# Altium PCB Eric Dog Tag PCB.PcbDoc
Units mil, origin at the board's own origin, x right, y up, seen from the top; angles counter-clockwise.
Board outline 1765 x 920 mil, 2 copper layers (Top Layer, Bottom Layer); 5 components, 4 nets, 20 pads, 0 vias.
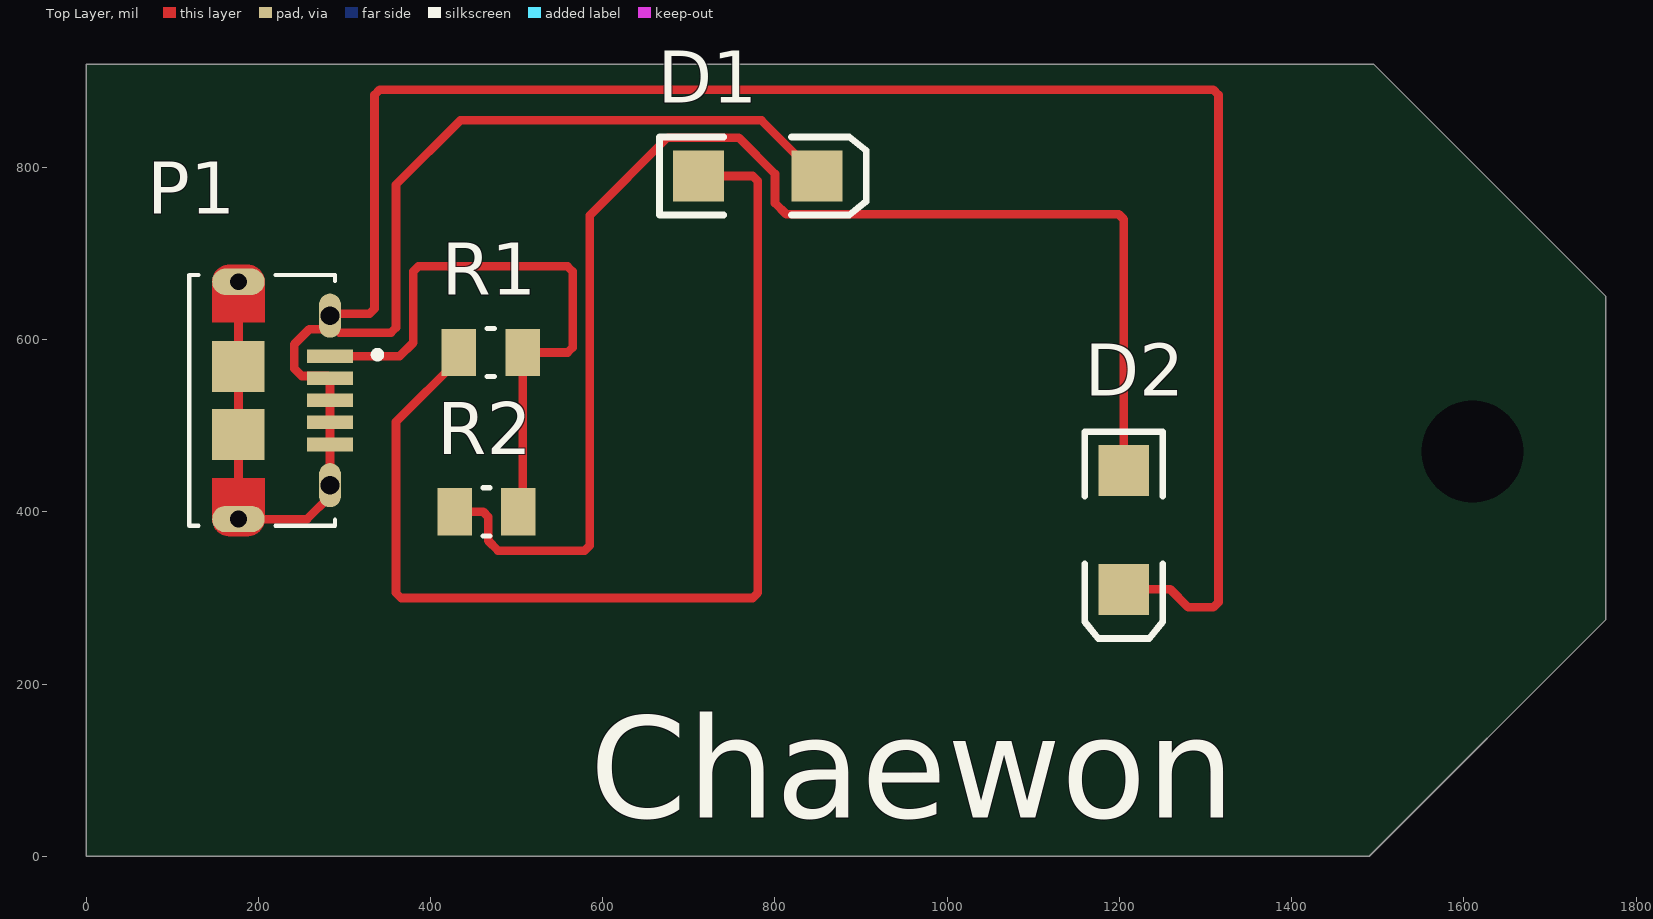
[diagram p0: Top Layer view]
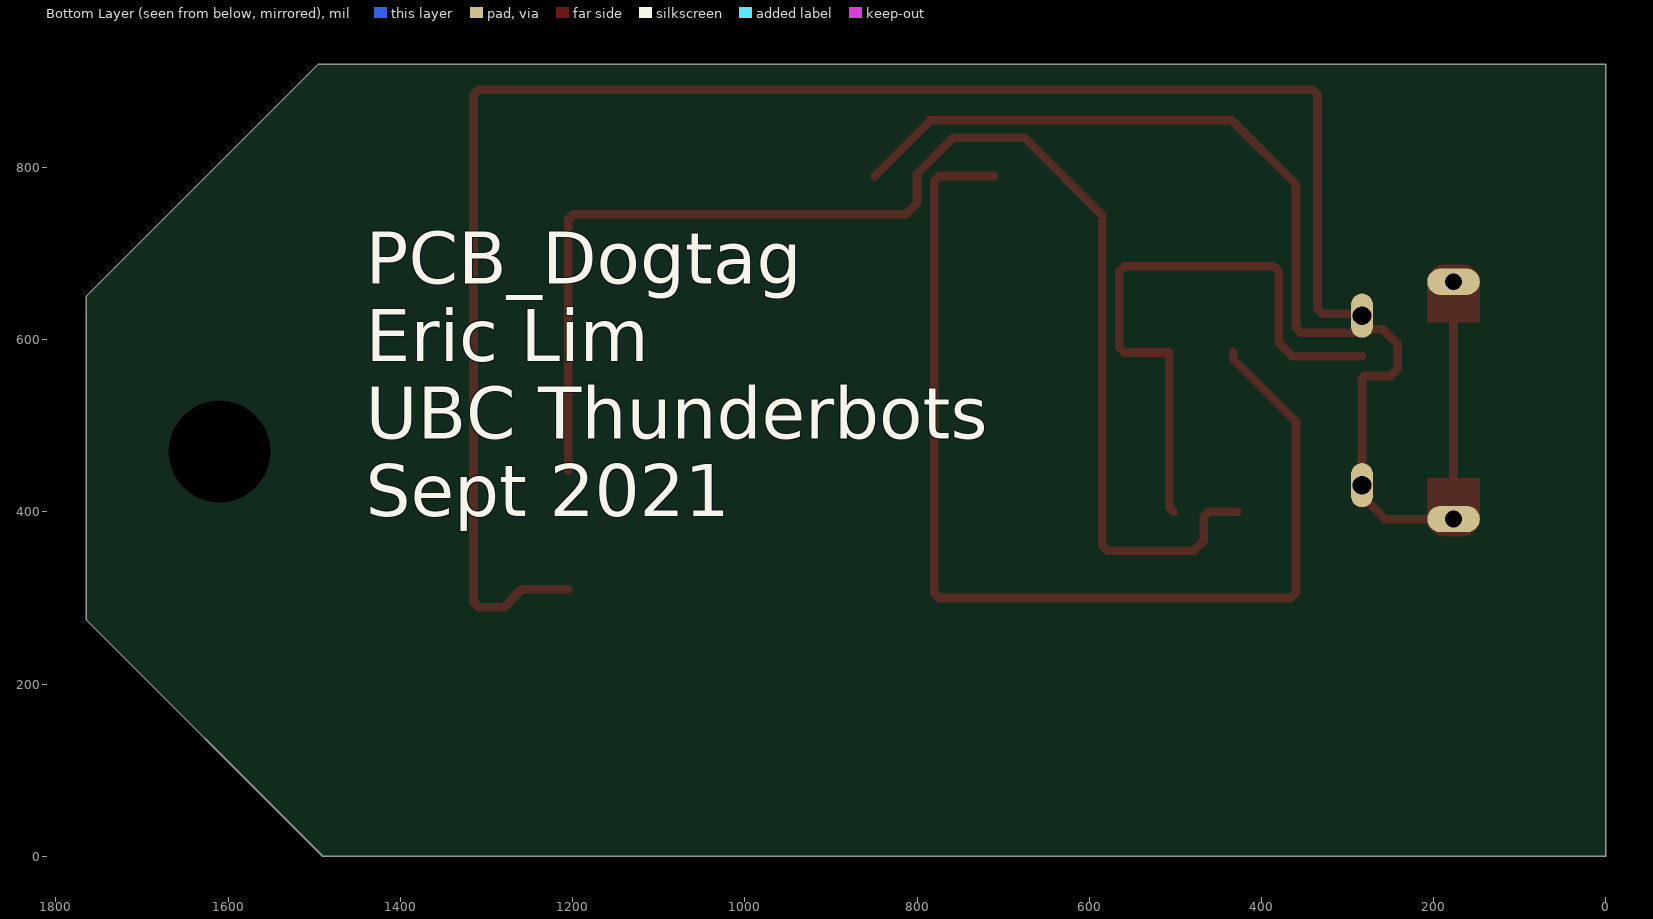
[diagram p1: Bottom Layer view, seen from below]

## Layer stack, top to bottom
Top Solder: solder mask 0.4, Solder Resist, Dk 3.5
Top Layer: signal copper 1.4
Dielectric 1: dielectric 12.6, FR-4, Dk 4.8
Bottom Layer: signal copper 1.4
Bottom Solder: solder mask 0.4, Solder Resist, Dk 3.5

## Board outline
1495,920 1765,650 1765,275 1490,0 0,0 0,920

## Design rules (kind name [scope] priority, off if disabled: settings)
Clearance [All] p1: gap=10 ignorepadtopadclearanceinfootprint=FALSE except(0: Arc-Hole Track-Hole SMDPad-Hole THPad-Hole Via-Hole Fill-Hole Poly-Hole Region-Hole Text-Hole)
PolygonConnect [All] p1: connectstyle=Relief reliefconductorwidth=10 reliefentries=4 polygonreliefangle="90 Angle" airgapwidth=10
RoomDefinition "Eric Dog Tag PCB" [InComponentClass('Eric Dog Tag PCB')] p1: confinementstyle=ConfineIn formatcopy=TRUE lockcomponents=FALSE outline 1860,995 -118,995 -118,-75 1860,-75
RoutingVias [All] p1: holewidth=28 width=50 viastyle="Through Hole" minholewidth=28 minwidth=50 maxholewidth=28 maxwidth=50
SolderMaskExpansion [All] p1: expansion=4 istentingtop=FALSE
Width [All] p1: maxlimit=10 minlimit=10 preferedwidth=10
30 further rules are at their usual default settings.

## Components (designator, comment, footprint, x,y, rotation, side; value= is the part's Value field where it differs from the comment)
D1 "LED2" 3.2X1.6X1.1 780,790 r0 top
D2 "LED2" 3.2X1.6X1.1 1205,378.9 r270 top
P1 "10118194-0001LF" "USB Micro B Receptacle" 177.39,529.37 r270 top
R1 "240" 0805 470,585 r0 top
R2 "240" 0805 465,400 r0 top

## Footprints (in the part's own frame and the unit in brackets; to place one, negate y for a bottom-side part, rotate by r counter-clockwise, add the part's x,y. Pads: shape width x height; smd on the part's side, far side on the other; paste and mask are expansions set on the pad)
3.2X1.6X1.1 [mm]
  rect 1.5x1.5 smd: 1(-1.75,0) 2(1.75,0)
  silkscreen extent -2.9,-1.15 3.2,1.15
0805 [mil]
  rect 40x55 smd: 1(-37,0) 2(37,0)
  silkscreen extent -4,-28 4,28, body extent -47,-28 47,28, height 24
"USB Micro B Receptacle" [mm] "CONN RCPT USB2.0 MICRO B SMD R/A"
  rect 0.4x1.35 smd: 1(-1.3,2.69) 2(-0.65,2.69) 3(0,2.69) 4(0.65,2.69) 5(1.3,2.69)
  oval 1.3x0.65 hole 0.55: S1(-2.5,2.69) S2(2.5,2.69)
  oval 0.775x1.55 hole 0.5: S3(-3.5,-0.01) S6(3.5,-0.01)
  rect 1.5x1.55 smd: S4(-1,-0.01) S5(1,-0.01)
  Top Layer region: 194 vertices and 0 holes, not listed, extent -4,-0.785 -2.3,0.77
  Top Layer region: 194 vertices and 0 holes, not listed, extent 2.3,-0.79 4,0.765
  silkscreen extent -3.7,-1.46 3.7,4.19, body extent -4,-2.74 4.04,2.79, height 2.87

## Part data
D1 D2: library part "LED RED SMD", "Typical RED, GREEN, YELLOW, AMBER GaAs LED", Color=Red, Current - Test=20mA, Lens Color=Colorless, Package=1206, Voltage - Forward (Vf) (Typ)=1.7V, Lens Transparency=Clear
P1: library part "USB Micro B Receptacle", "USB - micro B USB 2.0 Receptacle Connector 5 Position Surface Mount, Right Angle; Through Hole", Rating="100VAC 1.8A", ComponentLink1Description=Digikey, ComponentLink1URL=https://www.digikey.ca/product-detail/en/amphenol-icc-fci/10118194-0001LF/609-4618-1-ND/2785382, ComponentLink2Description=Datasheet, ComponentLink2URL=https://www.digikey.ca/en/datasheets/amphenol-fci/amphenol-fci-io-usb-micro, Digikey=609-4618-1-ND, Digikey Link=https://www.digikey.ca/product-detail/en/amphenol-icc-fci/10118194-0001LF/609-4618-1-ND/2785382, MF="Amphenol ICC (FCI)", MP=10118194-0001LF, Price="0.62000 CAD"
R1 R2: library part "RES 240.0 1/8W", "RES SMD 240 OHM 5% 1/8W 0805", Package=0805, Power (Watts)=0.125W, Tolerance=5%

## Free pads (board coordinates)
  round 60 hole 118.11: 2(1610,470)

## Nets (pads, with @x,y where several pads share a name; then routed paths per layer and width w, separated by ;. In a path a pad name is that pad's centre, name@x,y a point inside that pad or via, vN(x,y) a via of type N, cw(c..) or ccw(c..) an arc to the next point about the centre after c; other vN are vias at no path point)
GND: D1.2 D2.2 P1.2 P1.3 P1.4 P1.5 P1.S1 P1.S2 P1.S3 P1.S4 P1.S5 P1.S6 | length 3459.1
  Top Layer w10: P1.S3 P1.S4 P1.S5 P1.S6 256.72,391.57 283.3,418.15 P1.S2 P1.5 P1.4 P1.3 P1.2 280.58,557.68 250.51,557.68 241.72,566.46 241.72,594.64 259.1,612.02 276.1,612.02 P1.S1@283.3,619.22 ; D1.2 784.37,854.53 434.53,854.53 360,780 360,614.01 354.14,608.15 294.36,608.15 P1.S1@283.3,619.22 ; D2.2 1258.91,310 1279.76,289.14 1309.14,289.14 1315,295 1315,884.14 1309.14,890 340.86,890 335,884.14 335,635.86 329.14,630 285.5,630 P1.S1 P1.S1@283.3,619.22
NetD1_1: D1.1 R1.1 | length 1283.8
  Top Layer w10: R1.1 433,577.5 360,504.5 360,305.86 365.86,300 774.14,300 780,305.86 780,784.14 774.14,790 D1.1
NetD2_1: D2.1 R2.1 | length 1586.1
  Top Layer w10: R2.1 461.14,400 467,394.14 467,366.29 478.29,355 579.14,355 585,360.86 585,744.17 675.36,834.53 757.9,834.53 800,792.43 800,758.63 813.16,745.47 1199.14,745.47 1205,739.61 D2.1
NetP1_1: P1.1 R1.2 R2.2 | length 711.6
  Top Layer w10: P1.1 364.14,580.55 380,596.41 380,679.14 385.86,685 559.14,685 565,679.14 565,590.86 559.14,585 R1.2 507,405 R2.2

## Silkscreen, mask and mechanical layers (free items; w line width, h text height)
Top Overlay:
  text "Chaewon" at 585,45 h118.11
Bottom Overlay:
  text "PCB_Dogtag / Eric Lim / UBC Thunderbots / Sept 2021" at 1440,395 h60
Mechanical 1:
  the board outline again, w5

## Text inside footprints (layer, text, board x,y; h text height)
P1: Mechanical 13 "PCB END" at 84.48,606.14 h73.82 r270; Mechanical 13 "PCB END" at 84.48,606.14 h73.82 r270